# Altium PCB PCB - Copy.PcbDoc
Units mm, origin at the board's own origin, x right, y up, seen from the top; angles counter-clockwise.
Board outline 152.4 x 101.6 mm, 2 copper layers (Top Layer, Bottom Layer); 28 components, 24 nets, 132 pads, 0 vias.
Unrouted connection lines stored in the file: 57.
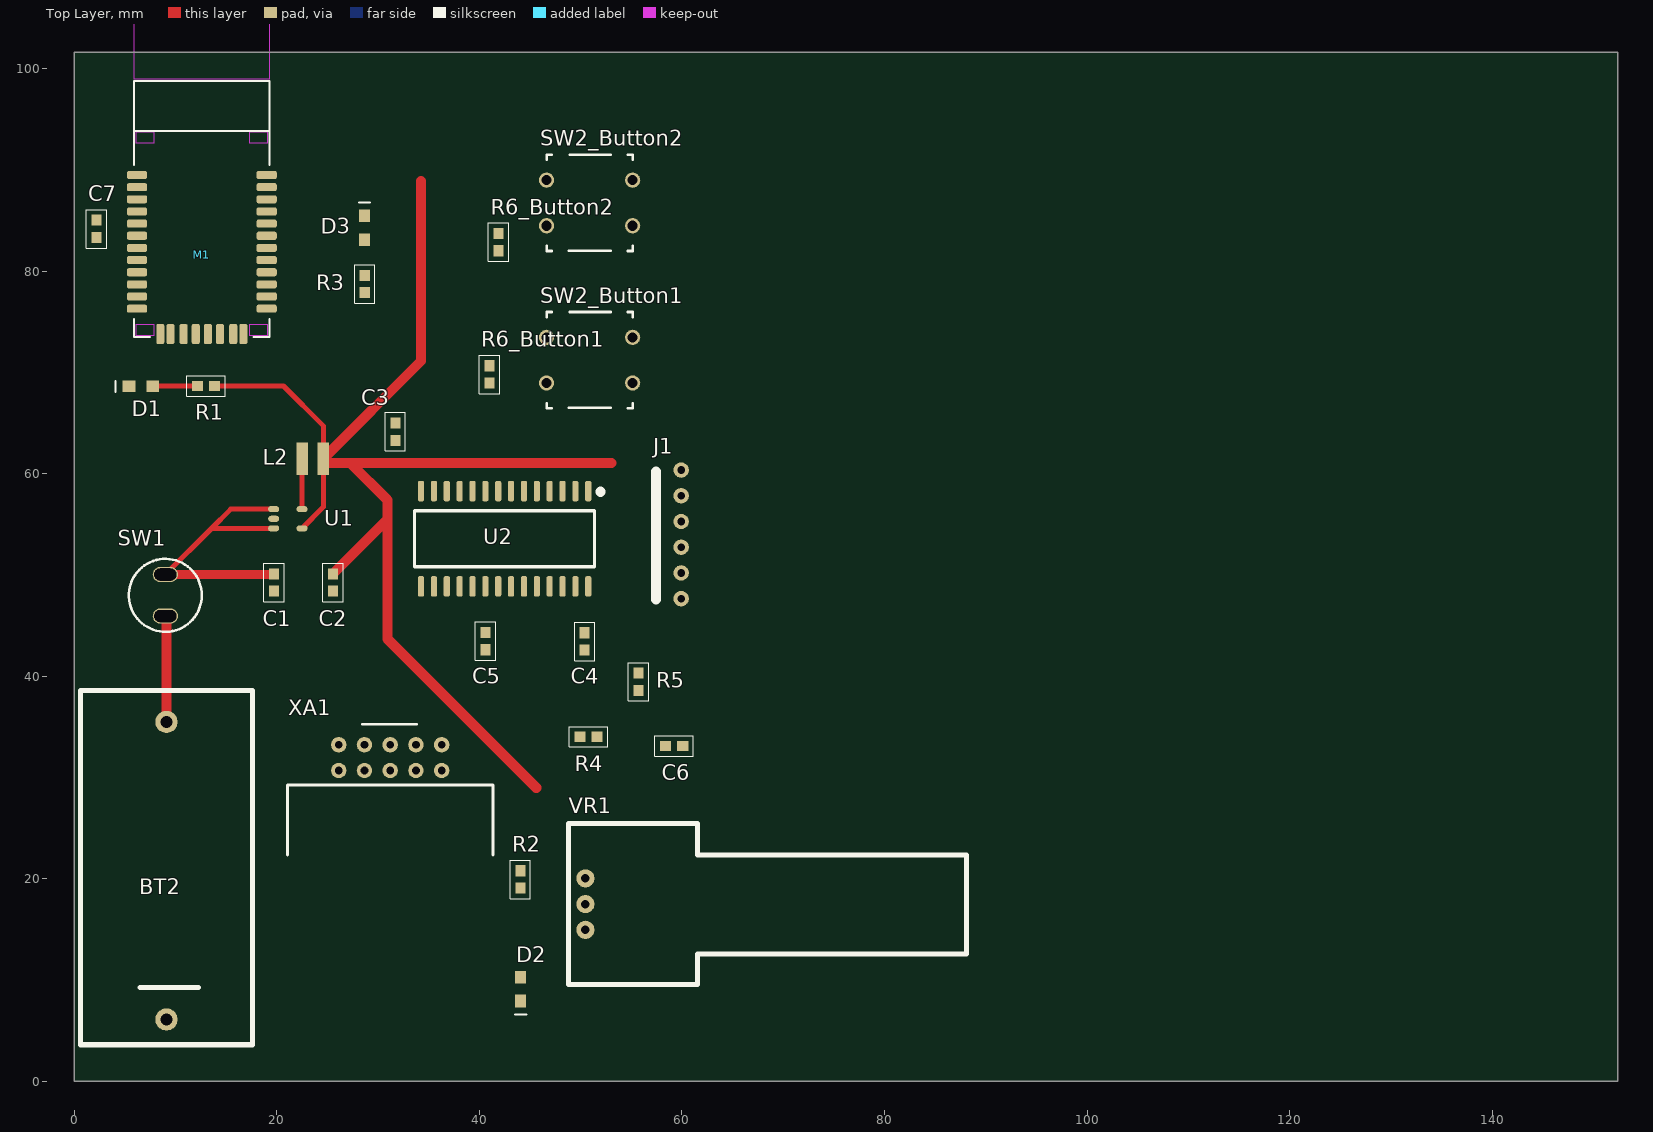
[diagram p0: Top Layer view]
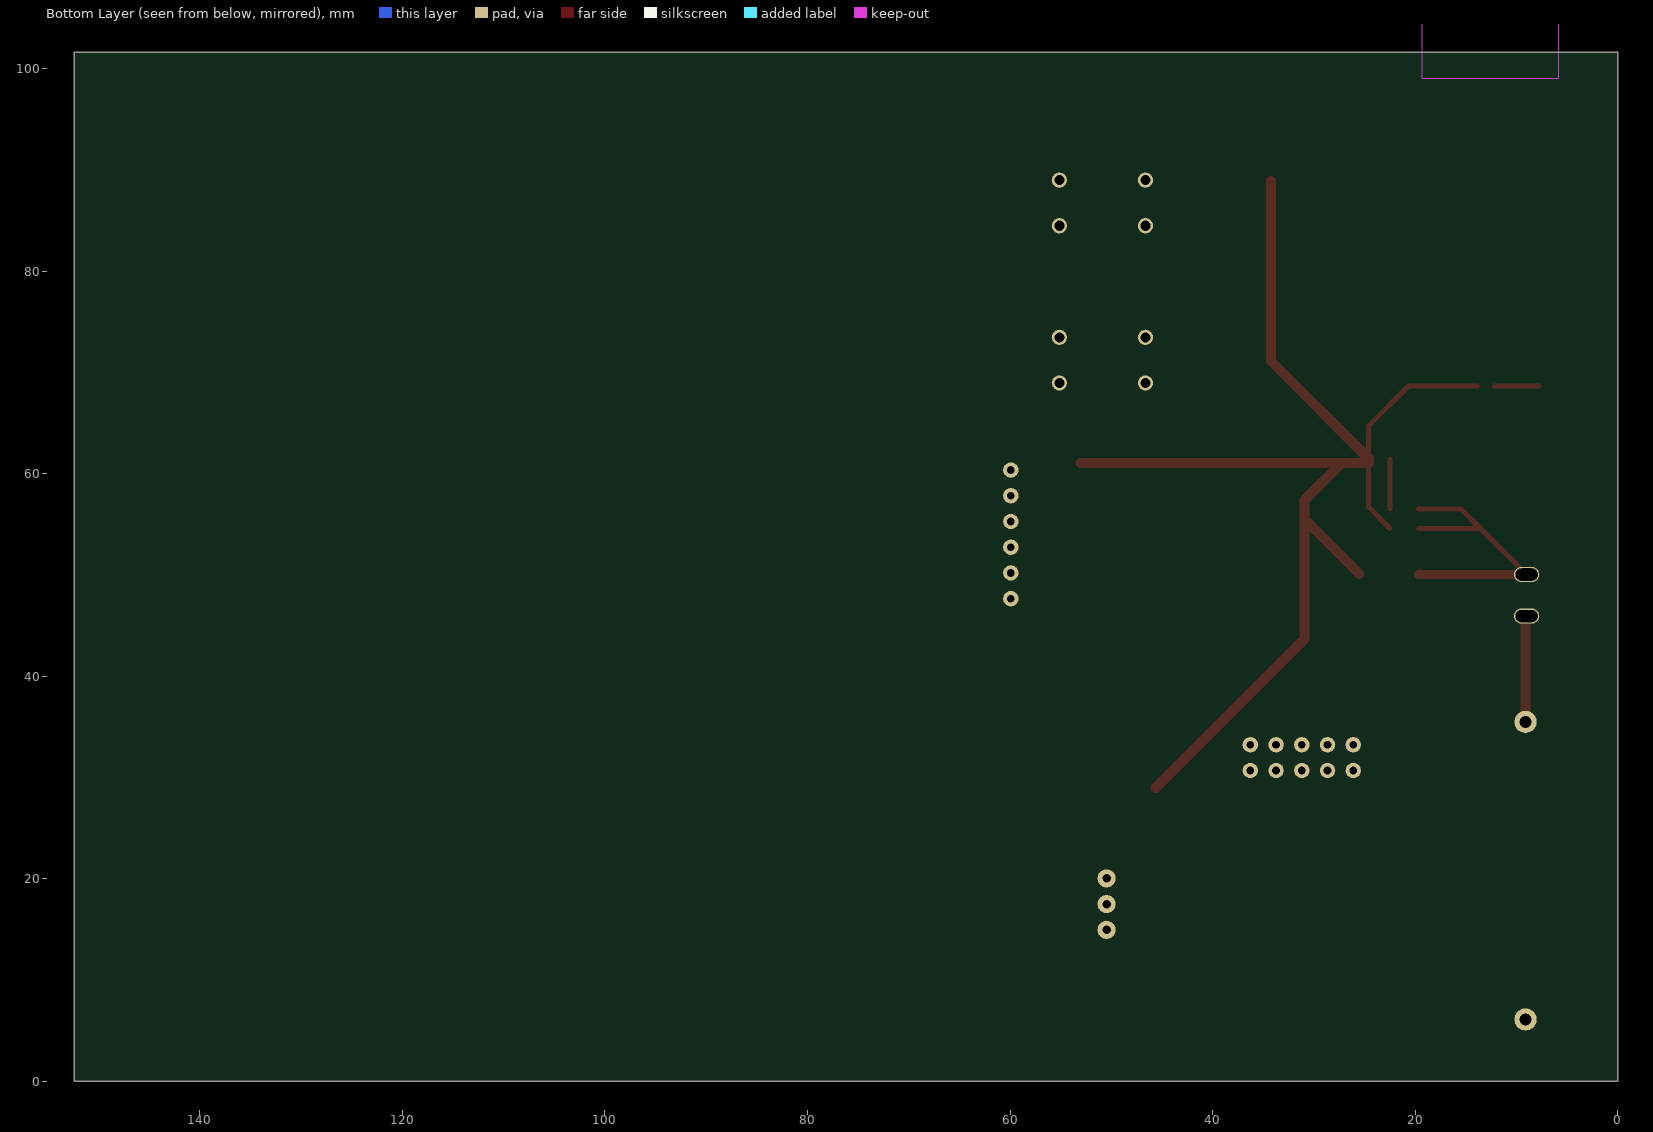
[diagram p1: Bottom Layer view, seen from below]

## Layer stack, top to bottom
Top Solder: solder mask 0.0102, Solder Resist, Dk 3.5
Top Layer: signal copper 0.0356
Dielectric 1: dielectric 0.32, FR-4, Dk 4.8
Bottom Layer: signal copper 0.0356
Bottom Solder: solder mask 0.0102, Solder Resist, Dk 3.5

## Board outline
0,0 152.4,0 152.4,50.8 152.4,101.6 76.098,101.6 0,101.6

## Design rules (kind name [scope] priority, off if disabled: settings)
Clearance [All] p1: gap=0.2
HoleSize [All] p1: absolutevalues=TRUE maxlimit=2.54 minlimit=0.3 maxpercent=80.000 minpercent=20.000
PolygonConnect [All] p1: connectstyle=Relief reliefconductorwidth=0.254 reliefentries=4 polygonreliefangle="90 Angle" airgapwidth=0.254
RoutingVias [All] p1: holewidth=0.711 width=1.27 viastyle="Through Hole" minholewidth=0.3 minwidth=0.7 maxholewidth=0.711 maxwidth=1.27
SolderMaskExpansion [All] p1: expansion=0.102
UnpouredPolygon [All] p1: allowunpoured=FALSE
Width [All] p1: maxlimit=2 minlimit=0.2 preferedwidth=0.254
28 further rules are at their usual default settings.

## Classes and differential pairs
channel class Button: Button1 Button2
component class PIC32MX: C3 C4 C5 C6 D2 J1 R2 R4 R5 U2 VR1
component class Button2: R6_Button2 SW2_Button2
component class Button1: R6_Button1 SW2_Button1
component class Bluetooth: C7 D3 M1 R3
component class Alim: BT2 C1 C2 D1 L2 R1 SW1 U1
component class 9-axe: XA1

## Components (designator, comment, footprint, x,y, rotation, side; value= is the part's Value field where it differs from the comment)
BT2 "Battery" "Battery Holder" 9.1,6.1 r90 top
C1 "4.7 uF" "CAP 0603" 19.71,49.251 r90 top
C2 "10 uF" "CAP 0603" 25.552,49.251 r90 top
C3 "0.1uF" "CAP 0603" 31.699,64.135 r270 top
C4 "0.1uF" "CAP 0603" 50.394,43.434 r90 top
C5 "10uF" "CAP 0603" 40.615,43.459 r90 top
C6 "0.1uF" "CAP 0603" 59.233,33.096 r180 top
C7 "Cap" "CAP 0603" 2.184,84.176 r270 top
D1 "2mA, 1.8V" LED 6.579,68.631 r180 top
D2 "2mA, 1.8V" LED 44.069,9.093 r270 top
D3 "2mA, 1.8V" LED 28.651,84.277 r90 top
J1 "Program / Debug" ICSP 59.919,47.65 r90 top
L2 "4.7uH" Coil 23.546,61.468 r0 top
M1 "RN42" RN42 5.893,73.482 r0 top
R1 "750" "RES 0603" 13.005,68.656 r0 top
R2 "750" "RES 0603" 44.044,19.939 r90 top
R3 "750" "RES 0603" 28.677,78.715 r270 top
R4 "10K" "RES 0603" 50.775,34.011 r180 top
R5 "1K" "RES 0603" 55.702,39.446 r270 top
R6_Button1 "10k" "RES 0603" 40.996,69.799 r90 top (schematic designator R6)
R6_Button2 "10k" "RES 0603" 41.885,82.855 r270 top (schematic designator R6)
SW1 "SW" "Nouveau Bouton" 8.992,47.981 r90 top
SW2_Button1 "SW-SPST" SWITCH 46.634,66.954 r0 top (schematic designator SW2)
SW2_Button2 "SW-SPST" SWITCH 46.634,82.474 r0 top (schematic designator SW2)
U1 "MCP1503B" MCP1603B/TSOT 19.685,56.49 r0 top
U2 "PIC32MX150F128B" PIC32MX150F128B 50.749,58.268 r270 top
VR1 "5k" 91A1A-B28-B13L 48.819,9.55 r0 top
XA1 "MOD-MPU9150 Breakout Board" MOD-MPU9150 30.81,27.838 r270 top

## Footprints (in the part's own frame and the unit in brackets; to place one, negate y for a bottom-side part, rotate by r counter-clockwise, add the part's x,y. Pads: shape width x height; smd on the part's side, far side on the other; paste and mask are expansions set on the pad)
91A1A-B28-B13L [mm] "Potard"
  round 1.8 hole 0.85: 1(1.65,5.4) 2(1.65,7.94) 3(1.65,10.48)
  silkscreen extent 0,0 39.27,15.88
"Battery Holder" [mm]
  round 2.2 hole 1.2: 1(29.38,0) 2(0,0)
  silkscreen extent -2.5,-8.5 32.5,8.5
"CAP 0603" [mm]
  rect 1.1x1 smd: 1(-0.85,0) 2(0.85,0)
  silkscreen extent -1.9,-1 1.9,1
Coil [mm]
  rect 1.12x3.2 smd: 1(-1.04,0) 2(1.04,0)
ICSP [mil] "ICSP - 6 PINS"
  round 60 hole 30: 1(0.01,-0.02) 2(100.01,-0.02) 3(200.01,-0.02) 4(300.01,-0.02) 5(400.01,-0.02) 6(500.01,-0.02)
  silkscreen extent -3,98 494,98
LED [mm]
  rect 1.25x1.1 smd: 1(-1.175,0) 2(1.175,0)
  silkscreen extent 2.49,-0.53 2.49,0.56
MCP1603B/TSOT [mm] "TSOT Package for MCP1603 and MCP1603B buck regulator"
  oval 1.1x0.6 smd: 1(0,0) 2(0,-0.95) 3(0,-1.9) 4(2.8,-1.9) 5(2.8,0)
MOD-MPU9150 [mil] "Header for the UEXT + 1"
  round 60 hole 30: 1(-212,215) 2(-112,215) 4(-112,115) 5(-212,15) 6(-112,15) 7(-212,-85) 8(-112,-85) 9(-212,-185) 10(-112,-185) 14(-212,115)
  silkscreen extent -292,-385 216,415
"Nouveau Bouton" [mm]
  oval 1.5x2.5 hole 1.2 slot 2.2 at 90 deg: 1(-2.05,0) 2(2.05,0)
  silkscreen extent -3.6,-3.6 3.6,3.6
PIC32MX150F128B [mm] "SOIC Package"
  rrect50% 2x0.6 smd: 1(0,0) 2(0,-1.27) 3(0,-2.54) 4(0,-3.81) 5(0,-5.08) 6(0,-6.35) 7(0,-7.62) 8(0,-8.89) 9(0,-10.16) 10(0,-11.43) 11(0,-12.7) 12(0,-13.97) 13(0,-15.24) 14(0,-16.51) 15(9.4,-16.51) 16(9.4,-15.24) 17(9.4,-13.97) 18(9.4,-12.7) 19(9.4,-11.43) 20(9.4,-10.16) 21(9.4,-8.89) 22(9.4,-7.62) 23(9.4,-6.35) 24(9.4,-5.08) 25(9.4,-3.81) 26(9.4,-2.54) 27(9.4,-1.27) 28(9.4,0)
  silkscreen extent 0.05,-17.14 7.46,1.19
"RES 0603" [mm]
  rect 1.1x1 smd: 1(-0.85,0) 2(0.85,0)
  silkscreen extent -1.9,-1 1.9,1
RN42 [mm] "RN42 Bluetooth Module with antenna"
  rrect50% 2x0.8 smd: 1(0.3,16) 2(0.3,14.8) 3(0.3,13.6) 4(0.3,12.4) 5(0.3,11.2) 6(0.3,10) 7(0.3,8.8) 8(0.3,7.6) 9(0.3,6.4) 10(0.3,5.2) 11(0.3,4) 12(0.3,2.8) 13(13.1,2.8) 14(13.1,4) 15(13.1,5.2) 16(13.1,6.4) 17(13.1,7.6) 18(13.1,8.8) 19(13.1,10) 20(13.1,11.2) 21(13.1,12.4) 22(13.1,13.6) 23(13.1,14.8) 24(13.1,16)
  rrect50% 0.8x2 smd mask+0.05: 28(10.8,0.3) 29(3.6,0.3) 30(9.8,0.3) 35(2.6,0.3)
  rrect50% 0.8x2 smd: 31(8.5,0.3) 32(7.3,0.3) 33(6.1,0.3) 34(4.9,0.3)
  Top Layer keep-out region: 0.2,0.2 2,0.2 2,1.2 0.2,1.2
  Top Layer keep-out region: 11.4,19.2 13.2,19.2 13.2,20.2 11.4,20.2
  Top Layer keep-out region: 0.2,19.2 2,19.2 2,20.2 0.2,20.2
  Top Layer keep-out region: 11.4,0.2 13.2,0.2 13.2,1.2 11.4,1.2
  Multi-Layer keep-out region: 0,25.5 13.4,25.5 13.4,54.3 0,54.3
  silkscreen extent 0,0 13.4,25.3
SWITCH [mm]
  round 1.5 hole 1: 1(0,2) 2(8.5,6.5) 3(0,6.5) 4(8.5,2)
  silkscreen extent 0,-0.49 8.51,9

## Part data
BT2: "Multicell Battery"
C1 C2 C3 C4 C5 C6: library part Cap, "Capacitor"
C7: "Capacitor"
D1 D2 D3: library part LED0, "Typical INFRARED GaAs LED"
J1: library part MHDR1X6, "Header, 6-Pin"
L2: library part Inductor, "Inductor"
M1: "RN42 Bluetooth Module by Roven Networks"
R1 R2 R3 R4 R5 R6_Button1 R6_Button2: library part Res1, "Resistor"
SW1: library part SW-SPST, "Single-Pole, Single-Throw Switch"
SW2_Button1 SW2_Button2: "Single-Pole, Single-Throw Switch"
U1: library part MCP1603B, "Fixed 3.3Vout 0.5Aout regulator"
U2: library part PIC32MX130F256B, "PIC32MX Family Microcontroller"
VR1: library part RPot, "Potentiometer"
XA1: library part MPU9150, "MPU9150 Breakout Board, displaying 3 headers"

## Nets (pads, with @x,y where several pads share a name; then routed paths per layer and width w, separated by ;. In a path a pad name is that pad's centre, name@x,y a point inside that pad or via, vN(x,y) a via of type N, cw(c..) or ccw(c..) an arc to the next point about the centre after c; other vN are vias at no path point)
"BOUTTON 1": R6_Button1.1 SW2_Button1.1 U2.9
"BOUTTON 2": R6_Button2.1 SW2_Button2.1 U2.10
GND: BT2.2 C1.1 C2.1 C3.1 C4.1 C5.1 C6.1 C7.1 D1.2 D2.2 J1.3 M1.1 M1.12 M1.28 M1.29 SW2_Button1.2 SW2_Button2.2 U1.2 U2.8 U2.19 U2.27 VR1.2 XA1.2
MCLR: J1.1 R5.1 U2.1
NetBT2_1: BT2.1 SW1.1 | length 10.3
  Top Layer w1: BT2.1 SW1.1@9.1,45.822
NetC1_2: C1.2 SW1.2 U1.1 U1.3 | length 30.4
  Top Layer w0.5: SW1.2 13.551,54.59 ; C1.2@19.526,50.285 C1.2 ; U1.3 13.551,54.59 ; U1.1 15.451,56.49 13.551,54.59
  Top Layer w0.9: SW1.2 C1.2@19.64,50.031
NetC5_2: C5.2 U2.20
NetC6_2: C6.2 R4.1 R5.2
NetD1_1: D1.1 R1.1 | length 4.4
  Top Layer w0.5: D1.1@7.779,68.656 R1.1
NetD2_1: D2.1 R2.1
NetD3_1: D3.1 R3.1
NetD3_2: D3.2 M1.21
NetL2_1: L2.1 U1.5 | length 5
  Top Layer w0.5: U1.5 L2.1@22.485,61.447
NetM1_5: M1.5 U2.7
NetM1_13: M1.13 U2.11
NetM1_14: M1.14 U2.15
NetR2_2: R2.2 U2.25
NetU2_17: U2.17 XA1.5
NetU2_18: U2.18 XA1.6
NetU2_21: U2.21 XA1.14
NetU2_26: U2.26 VR1.3
PGEC: J1.5 U2.5
PGED: J1.4 U2.4
V3P3: C2.2 C3.2 C4.2 C7.2 J1.2 L2.2 M1.11 R1.2 R3.2 R4.2 R6_Button1.2 R6_Button2.2 U1.4 U2.13 U2.28 VR1.1 XA1.1 | length 133.3
  Top Layer w0.5: R1.2 20.65,68.656 24.586,64.721 L2.2 ; U1.4 24.586,56.69 L2.2 ; L2.2@25.018,61.036 L2.2
  Top Layer w1: L2.2@24.586,61.036 53.061,61.036 ; L2.2 34.239,71.121 34.239,88.875 ; L2.2@25.018,61.036 27.28,61.036 30.912,57.404 30.912,55.46 ; C2.2 30.912,55.46 ; 45.618,28.981 30.912,43.688 30.912,55.46
pads on no net: J1.6 M1.2 M1.3 M1.4 M1.6 M1.7 M1.8 M1.9 M1.10 M1.15 M1.16 M1.17 M1.18 M1.19 M1.20 M1.22 M1.23 M1.24 M1.30 M1.31 M1.32 M1.33 M1.34 M1.35 SW2_Button1.3 SW2_Button1.4 SW2_Button2.3 SW2_Button2.4 U2.2 U2.3 U2.6 U2.12 U2.14 U2.16 U2.22 U2.23 U2.24 XA1.4 XA1.7 XA1.8 XA1.9 XA1.10

## Silkscreen, mask and mechanical layers (free items; w line width, h text height)
Mechanical 1:
  lines w0.254: 0,2.057 62.611,2.057 62.611,2.286 62.611,3.531 62.611,93.218 61.773,94.056 0.025,94.056 0.025,2.083